# EAGLE board seth (EAGLE 5.10)
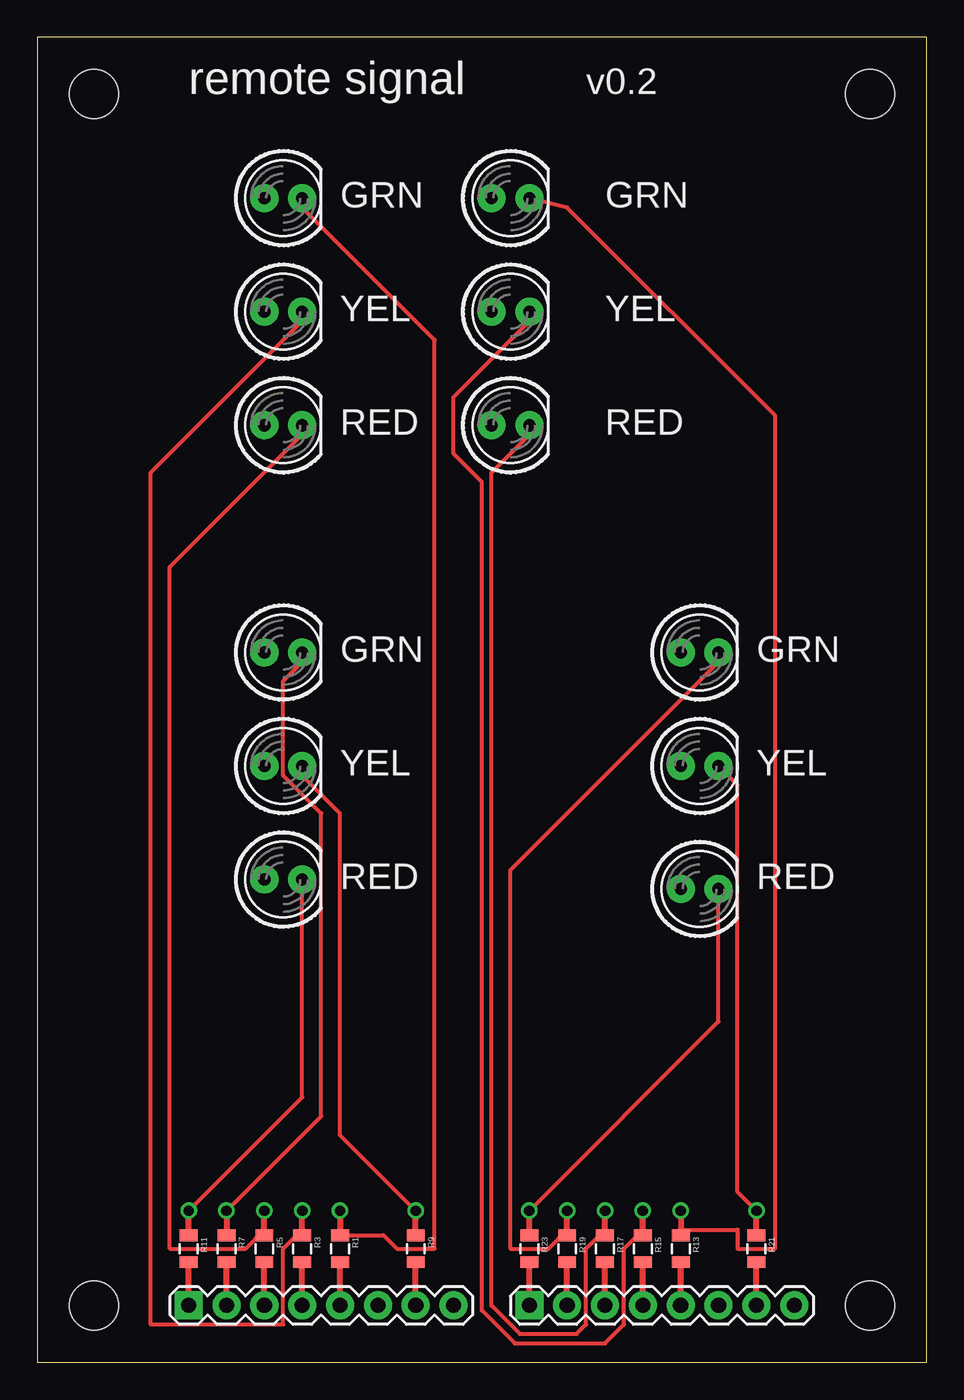
[diagram p0: board, top side]
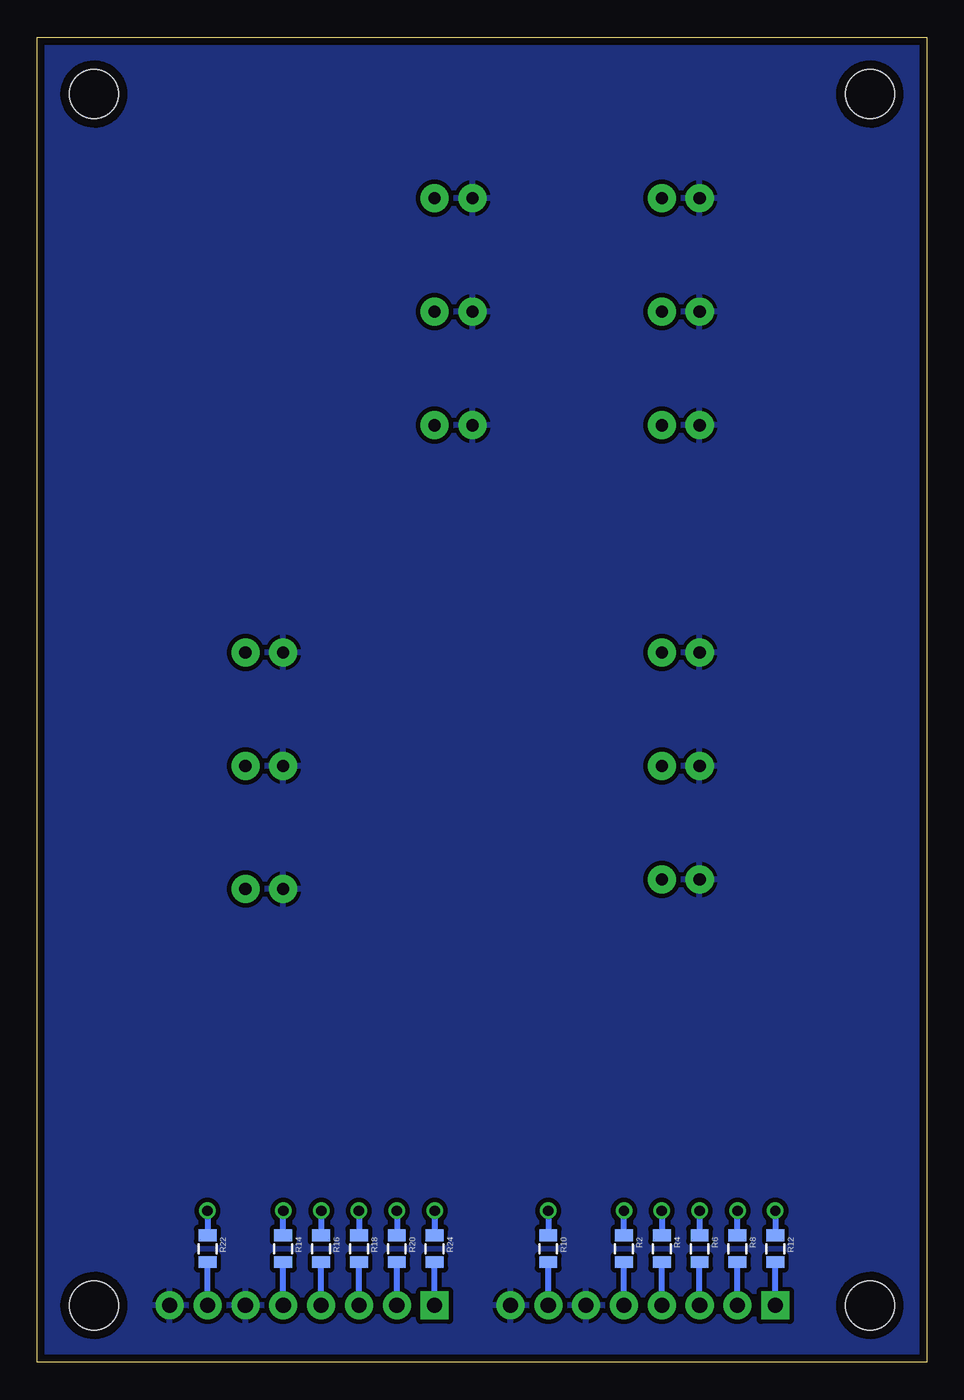
[diagram p1: board, bottom side, seen from below]

Size 59.69 x 88.9 mm. Coordinates in mm from the lower left corner, seen from the top.
Outline: 0,0 59.69,0 59.69,88.9 0,88.9 0,0
Copper layers (1*16): Top 0.0178mm / dielectric 1.4986mm / Bottom 0.0178mm
Design rules "SSC-EAGLE-2Lyr_v1.0.0.3": minimum track width 6mil, minimum drill 14mil, track to track 6mil, track to pad 6mil, pad to pad 6mil, via to via 6mil, smd to smd 6mil, copper to edge 20mil, drill to drill 16mil, minimum pad ring 8mil, minimum via ring 8mil, stop-mask expansion 3mil, vias tented up to drill 0mil, thermal gap 10mil

## Footprints (pad centres in the part's own frame; a part is rotated, then mirrored left to right if it is on the bottom)
STAND-OFF = hole 3.302: 0,0
1X08 = drill 1.016 pad 1.88 square: 1 0,0 | drill 1.016 pad 1.88 round: 2 2.54,0; 3 5.08,0; 4 7.62,0; 5 10.16,0; 6 12.7,0; 7 15.24,0; 8 17.78,0
LED5MM = drill 0.813 pad 1.88 round: A -1.27,0; K 1.27,0
0805 = smd 0.8 x 1.2: 1 -0.9,0; 2 0.9,0

## Placement (x,y rotation side)
JP1  STAND-OFF  [STAND-OFF]  3.81,85.09 0 top
JP2  STAND-OFF  [STAND-OFF]  3.81,3.81 0 top
JP3  STAND-OFF  [STAND-OFF]  55.88,3.81 0 top
JP4  STAND-OFF  [STAND-OFF]  55.88,85.09 0 top
JP5  [1X08]  10.16,3.81 0 top
JP6  [1X08]  33.02,3.81 0 top
LED1  [LED5MM]  16.51,78.11 0 top
LED2  [LED5MM]  16.51,70.48 0 top
LED3  [LED5MM]  16.51,62.87 0 top
LED4  [LED5MM]  16.51,47.62 0 top
LED5  [LED5MM]  16.51,40.01 0 top
LED6  [LED5MM]  16.51,32.38 0 top
LED7  [LED5MM]  31.75,78.11 0 top
LED8  [LED5MM]  31.75,70.48 0 top
LED9  [LED5MM]  31.75,62.87 0 top
LED10  [LED5MM]  44.45,47.62 0 top
LED11  [LED5MM]  44.45,40.01 0 top
LED12  [LED5MM]  44.45,31.75 0 top
R1  [0805]  20.32,7.62 270 top
R2  [0805]  20.32,7.62 270 bottom
R3  [0805]  17.78,7.62 270 top
R4  [0805]  17.78,7.62 270 bottom
R5  [0805]  15.24,7.62 270 top
R6  [0805]  15.24,7.62 270 bottom
R7  [0805]  12.7,7.62 270 top
R8  [0805]  12.7,7.62 270 bottom
R9  [0805]  25.4,7.62 270 top
R10  [0805]  25.4,7.62 270 bottom
R11  [0805]  10.16,7.62 270 top
R12  [0805]  10.16,7.62 270 bottom
R13  [0805]  43.18,7.62 270 top
R14  [0805]  43.18,7.62 270 bottom
R15  [0805]  40.64,7.62 270 top
R16  [0805]  40.64,7.62 270 bottom
R17  [0805]  38.1,7.62 270 top
R18  [0805]  38.1,7.62 270 bottom
R19  [0805]  35.56,7.62 270 top
R20  [0805]  35.56,7.62 270 bottom
R21  [0805]  48.26,7.62 270 top
R22  [0805]  48.26,7.62 270 bottom
R23  [0805]  33.02,7.62 270 top
R24  [0805]  33.02,7.62 270 bottom

## Library data of the parts
JP1-JP6 LED1-LED12 R1-R24 = SparkFun

## Nets
HIGHGREEN: JP5.5 R1.2 R2.2
HIGHGREEN2: JP6.5 R13.2 R14.2
HIGHRED: JP5.3 R5.2 R6.2
HIGHRED2: JP6.3 R17.2 R18.2
HIGHYELLOW: JP5.4 R3.2 R4.2
HIGHYELLOW2: JP6.4 R15.2 R16.2
LOWGREEN: JP5.2 R7.2 R8.2
LOWGREEN2: JP6.2 R19.2 R20.2
LOWRED: JP5.1 R11.2 R12.2
LOWRED2: JP6.1 R23.2 R24.2
LOWYELLOW: JP5.7 R9.2 R10.2
LOWYELLOW2: JP6.7 R21.2 R22.2
N$1: LED1.K R1.1 R2.1
N$2: LED2.K R3.1 R4.1
N$3: LED3.K R5.1 R6.1
N$4: LED4.K R7.1 R8.1
N$5: LED5.K R9.1 R10.1
N$6: LED6.K R11.1 R12.1
N$7: LED7.K R13.1 R14.1
N$8: LED8.K R15.1 R16.1
N$9: LED9.K R17.1 R18.1
N$10: LED10.K R19.1 R20.1
N$11: LED11.K R21.1 R22.1
N$12: LED12.K R23.1 R24.1
VCC: JP5.6 JP5.8 JP6.6 JP6.8 LED1.A LED2.A LED3.A LED4.A LED5.A LED6.A LED7.A LED8.A LED9.A LED10.A LED11.A LED12.A

## Tracks (layer width: path | path; a pad name or v marks a point on that pad's centre or on a via)
HIGHGREEN
  Top 0.406: JP5.5 R2.2
  Bottom 0.406: JP5.5 R2.2
HIGHGREEN2
  Top 0.406: JP6.5 R14.2
  Bottom 0.406: JP6.5 R14.2
HIGHRED
  Top 0.406: JP5.3 R6.2
  Bottom 0.406: JP5.3 R6.2
HIGHRED2
  Top 0.406: JP6.3 R18.2
  Bottom 0.406: JP6.3 R18.2
HIGHYELLOW
  Top 0.406: JP5.4 R4.2
  Bottom 0.406: JP5.4 R4.2
HIGHYELLOW2
  Top 0.406: JP6.4 R16.2
  Bottom 0.406: JP6.4 R16.2
LOWGREEN
  Top 0.406: JP5.2 R8.2
  Bottom 0.406: JP5.2 R8.2
LOWGREEN2
  Top 0.406: JP6.2 R20.2
  Bottom 0.406: JP6.2 R20.2
LOWRED
  Top 0.406: JP5.1 R11.2
  Bottom 0.406: JP5.1 R11.2
LOWRED2
  Top 0.406: JP6.1 R23.2
  Bottom 0.406: JP6.1 R23.2
LOWYELLOW
  Top 0.406: JP5.7 R9.2
  Bottom 0.406: JP5.7 R9.2
LOWYELLOW2
  Top 0.406: JP6.7 R21.2
  Bottom 0.406: JP6.7 R21.2
N$1  (via drill 0.7)
  Top 0.254: LED1.K 17.78,77.47 26.67,68.58 26.67,7.62 24.13,7.62 23.5,8.26 23.23,8.52 R2.1
  Top 0.406: v20.32,10.16 R2.1
  Bottom 0.406: R2.1 v20.32,10.16
N$2  (via drill 0.7)
  Top 0.254: 17.78,8.89 16.51,7.62 16.51,2.54 7.62,2.54 7.62,59.69 17.78,69.85 LED2.K
  Top 0.406: v17.78,10.16 17.78,8.89 R4.1
  Bottom 0.406: v17.78,10.16 R4.1
N$3  (via drill 0.7)
  Top 0.254: 15.24,8.89 13.97,7.62 8.89,7.62 8.89,53.34 17.78,62.23 LED3.K
  Top 0.406: v15.24,10.16 15.24,8.89 R6.1
  Bottom 0.406: v15.24,10.16 R6.1
N$4  (via drill 0.7)
  Top 0.254: v12.7,10.16 19.05,16.51 19.05,36.83 16.51,39.37 16.51,45.72 17.78,46.99 LED4.K
  Top 0.406: v12.7,10.16 R8.1
  Bottom 0.406: R8.1 v12.7,10.16
N$5  (via drill 0.7)
  Top 0.254: v25.4,10.16 20.32,15.24 20.32,36.83 17.78,39.37 LED5.K
  Top 0.406: R9.1 v25.4,10.16
  Bottom 0.406: v25.4,10.16 R9.1
N$6  (via drill 0.7)
  Top 0.254: v10.16,10.16 17.78,17.78 LED6.K
  Top 0.406: R11.1 v10.16,10.16
  Bottom 0.406: v10.16,10.16 R11.1
N$7  (via drill 0.7)
  Top 0.254: 43.18,8.89 46.99,8.89 46.99,7.62 49.53,7.62 49.53,63.5 35.56,77.47 LED7.K
  Top 0.406: v43.18,10.16 43.18,8.89 R14.1
  Bottom 0.406: R14.1 v43.18,10.16
N$8  (via drill 0.7)
  Top 0.254: 40.64,8.89 39.37,7.62 39.37,2.54 38.1,1.27 32.05,1.27 29.84,3.48 29.84,59.05 27.94,60.96 27.94,64.77 33.02,69.85 LED8.K
  Top 0.406: v40.64,10.16 40.64,8.89 R16.1
  Bottom 0.406: v40.64,10.16 R16.1
N$9  (via drill 0.7)
  Top 0.254: 38.1,8.89 36.83,7.62 36.83,2.54 36.2,1.91 32.38,1.91 30.48,3.81 30.48,59.69 33.02,62.23 LED9.K
  Top 0.406: v38.1,10.16 38.1,8.89 R18.1
  Bottom 0.406: v38.1,10.16 R18.1
N$10  (via drill 0.7)
  Top 0.254: 35.56,8.89 34.29,7.62 31.75,7.62 31.75,33.02 45.72,46.99 LED10.K
  Top 0.406: v35.56,10.16 35.56,8.89 R20.1
  Bottom 0.406: v35.56,10.16 R20.1
N$11  (via drill 0.7)
  Top 0.254: v48.26,10.16 46.99,11.43 46.99,38.73 LED11.K
  Top 0.406: R21.1 v48.26,10.16
  Bottom 0.406: v48.26,10.16 R21.1
N$12  (via drill 0.7)
  Top 0.254: v33.02,10.16 45.72,22.86 LED12.K
  Top 0.406: R23.1 v33.02,10.16
  Bottom 0.406: v33.02,10.16 R23.1
VCC
  pour Bottom (isolate 0.305): 0,0 0,88.9 59.69,88.9 59.69,87.63 59.69,0

## Text on the board
tPlace: remote signal | v0.2 | GRN | GRN | YEL | YEL | RED | RED | GRN | GRN | YEL | YEL | RED | RED